# Altium PCB activity_tracker_panel.PcbDoc
Units mm, origin at the board's own origin, x right, y up, seen from the top; angles counter-clockwise.
Board outline 148.5 x 148.5 mm, 4 copper layers (Top Layer, MidLayer1, Mid-Layer 2, Bottom Layer), stack 0.79 mm thick; 11 components, 29 nets, 514 pads, 2 vias.
Unrouted connection lines stored in the file: 1.
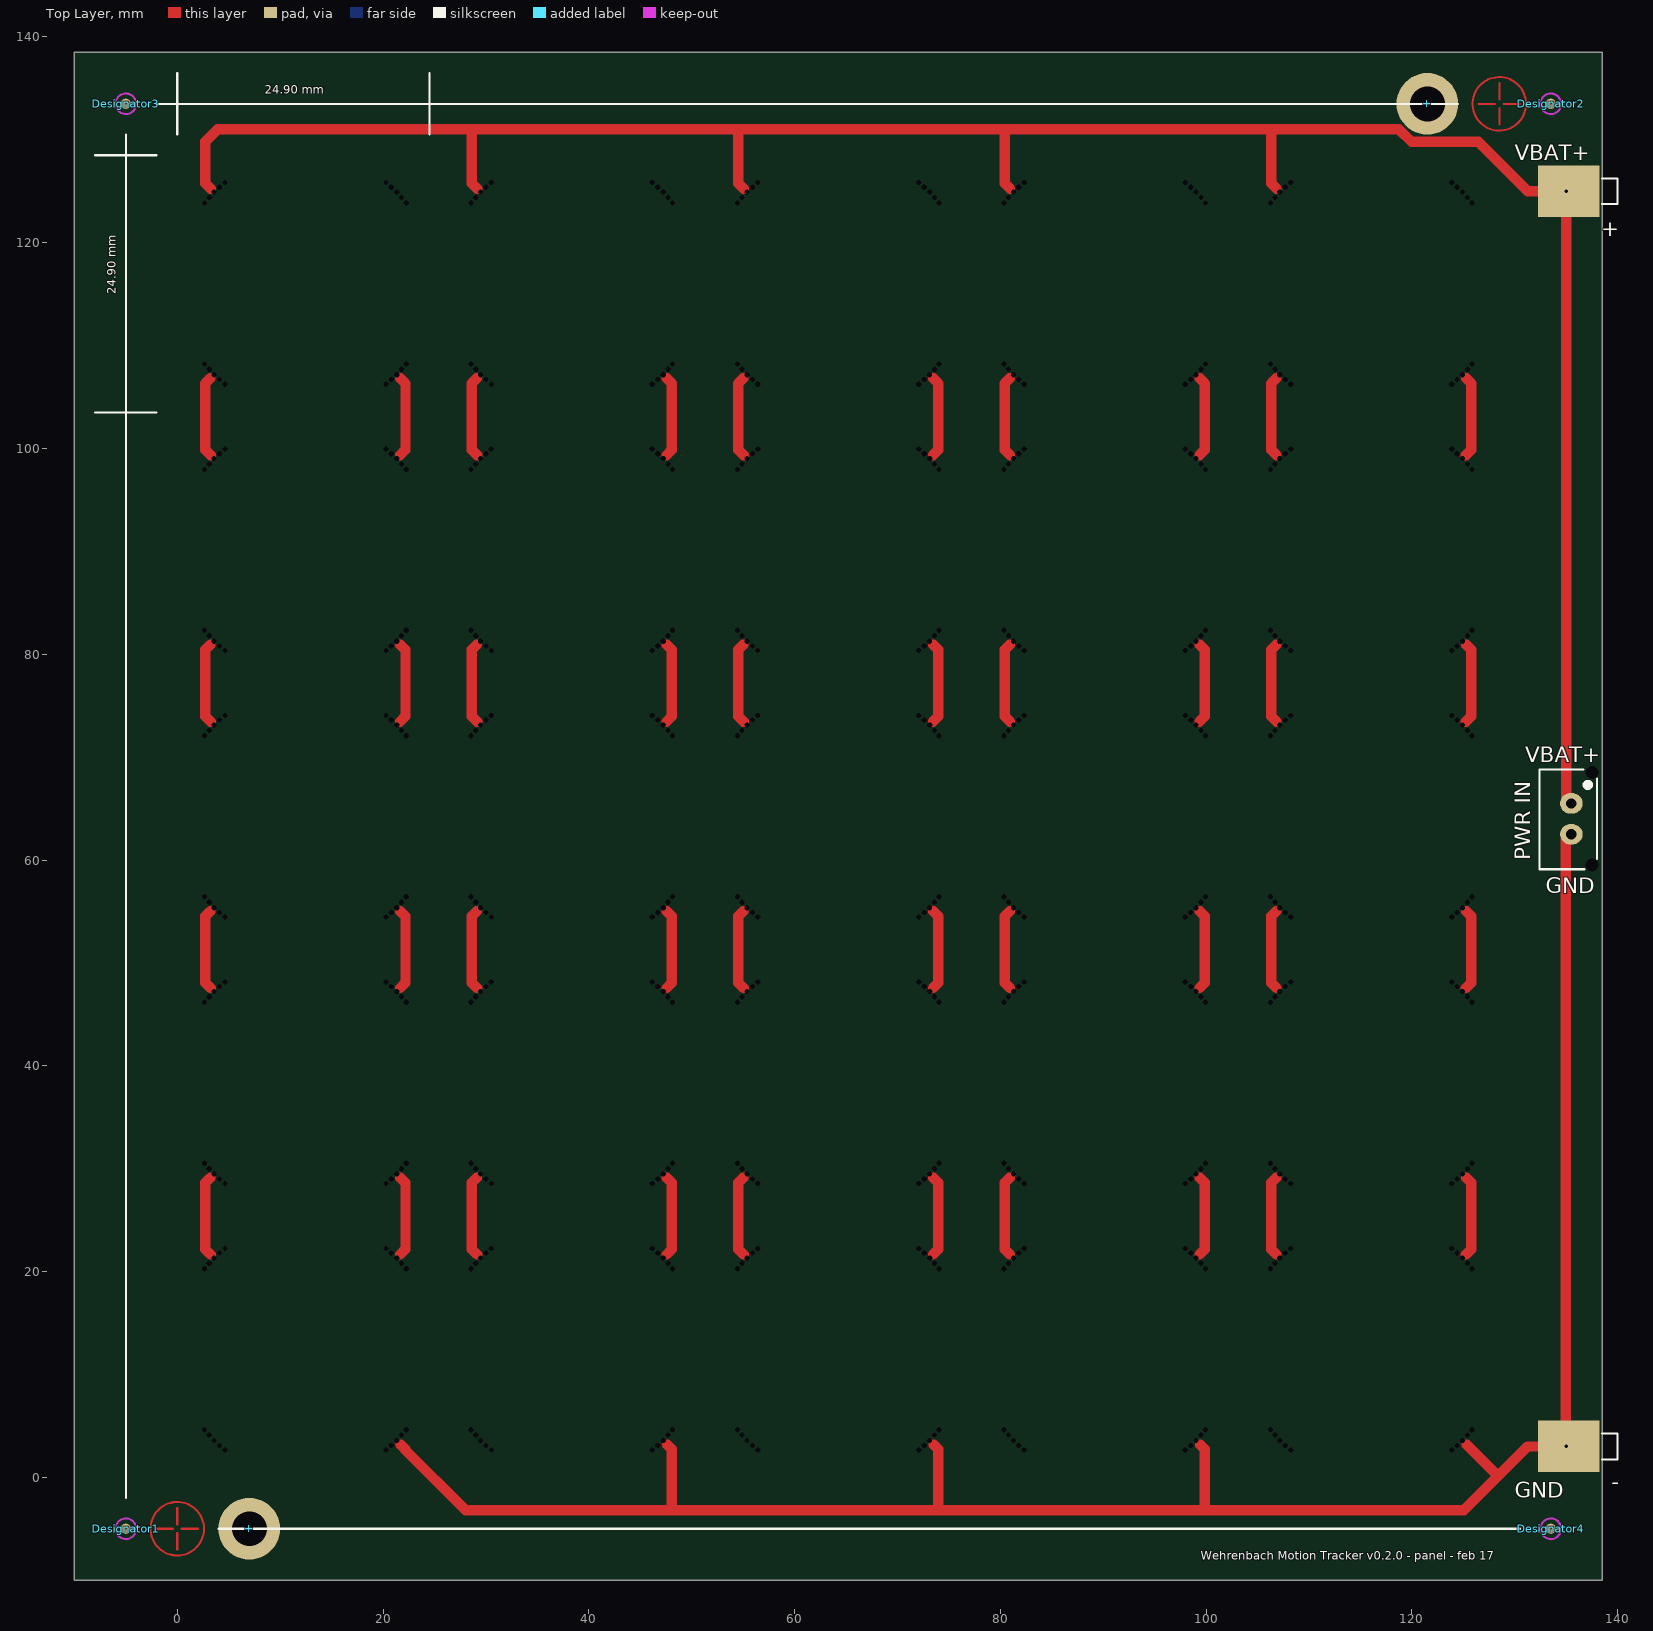
[diagram p0: Top Layer view]
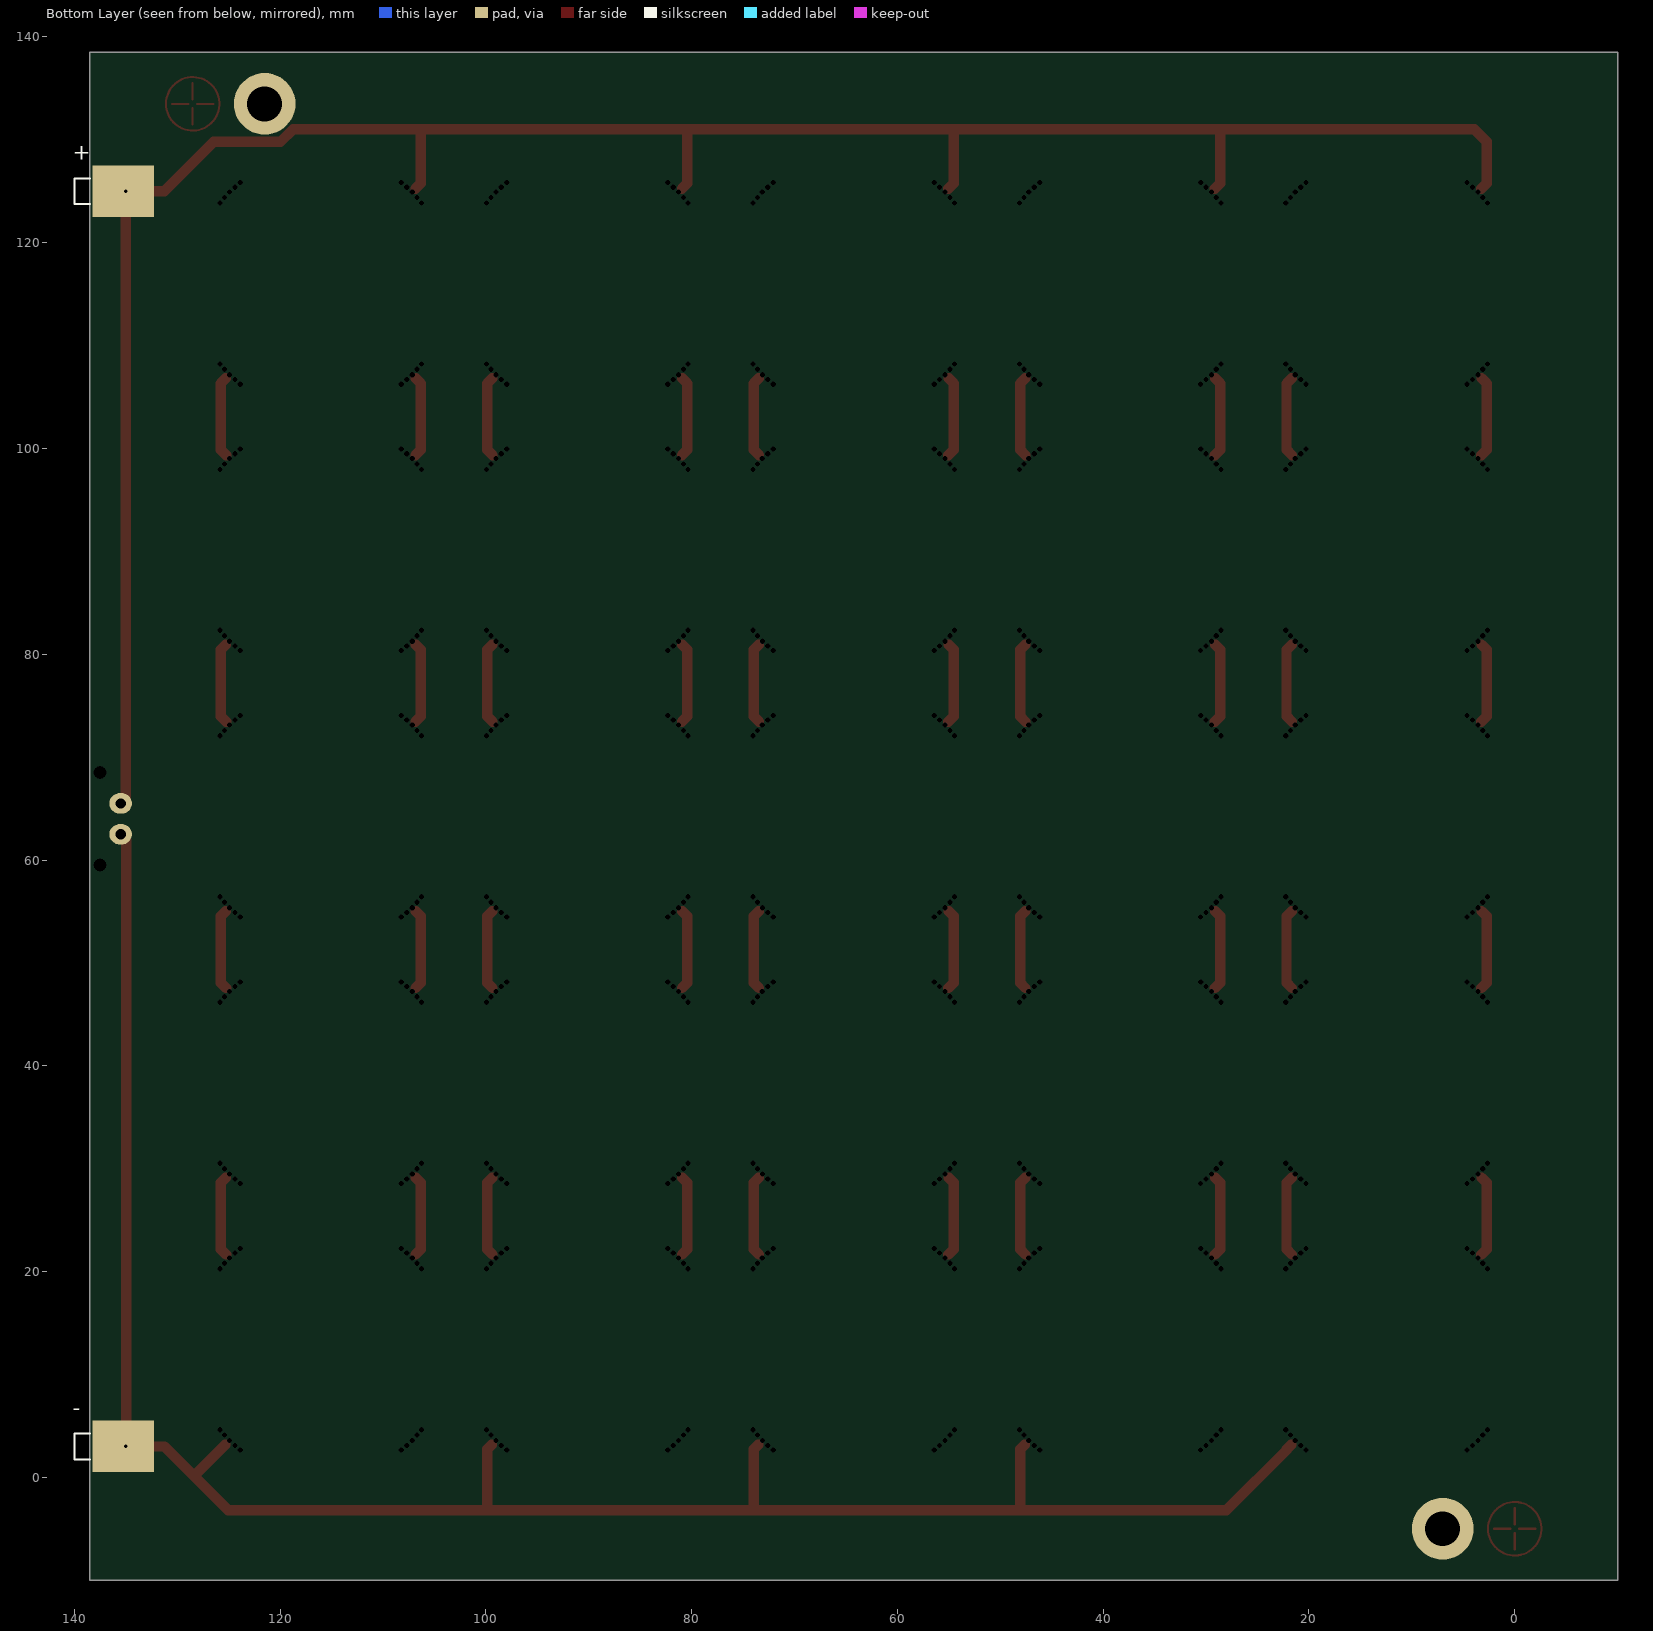
[diagram p1: Bottom Layer view, seen from below]

## Layer stack, top to bottom
Top Solder: solder mask 0.0102, Solder Resist, Dk 3.5
Top Layer: signal copper 0.0356
Dielectric1: prepreg 0.1, FR-4, Dk 4.8
MidLayer1: signal copper 0.0356
Dielectric2: prepreg 0.228, FR-4, Dk 4.8
Mid-Layer 2: signal copper 0.0356
Dielectric3: core 0.32, FR-4, Dk 4.8
Bottom Layer: signal copper 0.0356
Bottom Solder: solder mask 0.0102, Solder Resist, Dk 3.5

## Board outline
-9.999,-9.999 -9.999,138.501 138.501,138.501 138.501,-9.999 -9.999,-9.999

## Design rules (kind name [scope] priority, off if disabled: settings)
AcuteAngle [All] p1: minimum=4.00000000000000E+0001 checktracksonly=FALSE
Clearance ClearanceLogoStyle1 [All vs InComponentClass('logoStyle1')] p1: gap=0.3 ignorepadtopadclearanceinfootprint=FALSE except(0: Arc-Hole Track-Hole SMDPad-Hole THPad-Hole Via-Hole Fill-Hole Poly-Hole Region-Hole Text-Hole)
Clearance ClearanceKeepout [All vs IsKeepOut] p2: gap=0.001 ignorepadtopadclearanceinfootprint=FALSE except(0: Arc-Hole Track-Hole SMDPad-Hole THPad-Hole Via-Hole Fill-Hole Poly-Hole Region-Hole Text-Hole)
Clearance ClearanceThickWire [IsTrack And AsMM(Width) > 0.2] p3: gap=0.2 ignorepadtopadclearanceinfootprint=FALSE except(0: Arc-Hole Track-Hole SMDPad-Hole THPad-Hole Via-Hole Fill-Hole Poly-Hole Region-Hole Text-Hole)
Clearance ClearancePad [IsPad vs IsPad] p4: gap=0.15 ignorepadtopadclearanceinfootprint=FALSE except(0: Arc-Hole Track-Hole SMDPad-Hole THPad-Hole Via-Hole Fill-Hole Poly-Hole Region-Hole Text-Hole)
Clearance ClearancePolyPad [InPolygon vs IsPad] p5: gap=0.3 ignorepadtopadclearanceinfootprint=FALSE except(0: Arc-Hole Track-Hole SMDPad-Hole THPad-Hole Via-Hole Fill-Hole Poly-Hole Region-Hole Text-Hole)
Clearance ClearancePoly [InPolygon vs InPolygon] p6: gap=0.25 ignorepadtopadclearanceinfootprint=FALSE except(0: Arc-Hole Track-Hole SMDPad-Hole THPad-Hole Via-Hole Fill-Hole Poly-Hole Region-Hole Text-Hole)
Clearance [All] p7: gap=0.15 ignorepadtopadclearanceinfootprint=FALSE except(0: Arc-Hole Track-Hole SMDPad-Hole THPad-Hole Via-Hole Fill-Hole Poly-Hole Region-Hole Text-Hole)
ComponentClearance [All] p1: gap=0.1 collisioncheckmode=3 verticalgap=0.1 showdistances=TRUE
ComponentOrientations [All] p1: allowedrotations=32
Height [All] p1: minheight=0 maxheight=30 prefheight=1
HoleSize [All] p1: absolutevalues=TRUE maxlimit=15 minlimit=0.3 maxpercent=80.000 minpercent=20.000
HoleToHoleClearance [All] p1: gap=0.2 allowstackedmicrovias=TRUE
MinimumAnnularRing [All] p1: minimumring=0.15
MinimumSolderMaskSliver MinimumSolderMaskSliverLogo [All vs ( InComponentClass('ignoreSilkscreen') or InComponentClass('leitwertLogo'))] p1: minsoldermaskwidth=0
MinimumSolderMaskSliver [All] p2: minsoldermaskwidth=0.1
PasteMaskExpansion [All] p1: expansion=-0.075
PermittedLayers [All] p1: toplayerpermitted=TRUE bottomlayerpermitted=FALSE
PlaneClearance [All] p1: clearance=0.5
PlaneConnect [All] p1: planeconnectstyle=Relief reliefexpansion=0.5 reliefentries=4 reliefconductorwidth=0.25 reliefairgap=0.25
PolygonConnect PolygonConnectComponents [All vs InComponentClass('directConnect')] p1: connectstyle=Direct reliefconductorwidth=0.254 reliefentries=4 polygonreliefangle="90 Angle" airgapwidth=0.254
PolygonConnect PolygonConnectVia [IsVia] p2: connectstyle=Direct reliefconductorwidth=0.254 reliefentries=4 polygonreliefangle="90 Angle" airgapwidth=0.254
PolygonConnect PolygonConnectPoly [InPolygonClass('directConnect')] p3: connectstyle=Direct reliefconductorwidth=0.254 reliefentries=4 polygonreliefangle="90 Angle" airgapwidth=0.254
PolygonConnect [All] p4: connectstyle=Relief reliefconductorwidth=0.25 reliefentries=4 polygonreliefangle="90 Angle" airgapwidth=0.254
RoomDefinition Memory [InComponentClass('Memory')] p1: confinementstyle=ConfineIn formatcopy=TRUE lockcomponents=FALSE outline -6.574,-3.774 31.426,-3.774 31.426,29.426 -6.574,29.426
RoomDefinition activity_tracker [InComponentClass('activity_tracker')] p2: confinementstyle=ConfineIn formatcopy=TRUE lockcomponents=FALSE outline -23.574,-8.574 191.626,-8.574 191.626,28.426 -23.574,28.426
RoomDefinition Accelerometer [InComponentClass('Accelerometer')] p3: confinementstyle=ConfineIn formatcopy=TRUE lockcomponents=FALSE outline -8.374,-3.574 33.426,-3.574 33.426,29.426 -8.374,29.426
RoutingCorners [All] p1: cornerstyle=45-Degree minsetback=2.5 maxsetback=2.5
RoutingVias [All] p1: holewidth=0.3 width=0.6 viastyle="Through Hole" minholewidth=0.3 minwidth=0.5 maxholewidth=1.5 maxwidth=2
SilkToSilkClearance [All] p1: silktosilkclearance=0.1
SilkToSolderMaskClearance SilkscreenOverComponentPadsLogo [IsPad vs ( InComponentClass('ignoreSilkscreen') or InComponentClass('logoStyle1'))] p1: minsilkscreentomaskgap=0 clearancetoexposedcopper=TRUE
SilkToSolderMaskClearance SilkscreenOverComponentPads [IsPad vs not InComponentClass('ignoreSilkscreen')] p2: minsilkscreentomaskgap=0.001 clearancetoexposedcopper=TRUE
SolderMaskExpansion SolderMaskExpansionVia [IsVia] p1: expansion=-0.635
SolderMaskExpansion [All] p2: expansion=0.038
Width WidthLogoStyle1 [InComponentClass('logoStyle1')] p1: maxlimit=100 minlimit=0.15 preferedwidth=0.25 checkconnectedcopper=TRUE
Width [All] p2: maxlimit=10 minlimit=0.2 preferedwidth=0.2
19 further rules are at their usual default settings.

## Components (designator, comment, footprint, x,y, rotation, side; value= is the part's Value field where it differs from the comment)
+ "Comment" SOLDER_5x6 135.251,125.001 r180 bottom
+ "Comment" SOLDER_5x6 135.251,125.001 r180 top
+ "Comment" M3_PLATED_MEDIUM 7.001,-4.999 r270 top
+ "Comment" M3_PLATED_MEDIUM 121.501,133.501 r270 top
- "Comment" SOLDER_5x6 135.251,3.001 r180 top
- "Comment" SOLDER_5x6 135.251,3.001 r180 bottom
Designator1 "Comment" FEDUCIAL_1MM -4.999,-4.999 r0 top
Designator2 "Comment" FEDUCIAL_1MM 133.501,133.501 r180 top
Designator3 "Comment" FEDUCIAL_1MM -4.999,133.501 r0 top
Designator4 "Comment" FEDUCIAL_1MM 133.501,-4.999 r180 top
"PWR IN" "Comment" 0436500215 135.501,64.001 r270 top

## Footprints (in the part's own frame and the unit in brackets; to place one, negate y for a bottom-side part, rotate by r counter-clockwise, add the part's x,y. Pads: shape width x height; smd on the part's side, far side on the other; paste and mask are expansions set on the pad)
0436500215 [mm] "Molex MicroFit - CONN HEADER 2POS 3MM VERT TIN"
  oval 2x2.2 hole 1: 1(-1.5,0) 2(1.5,0)
  round 0 hole 1.27 unplated paste-1.27: H(-4.5,2) H(4.5,2)
  silkscreen extent -4.8,-3.1 4.9,2.5, body extent -4.83,-3.13 4.83,2.47, height 9.95
FEDUCIAL_1MM [mm] "Feducial 1mm diameter"
  round 1 smd paste-0.5 mask+0.5: F(0,0)
  Top Layer keep-out circle w0.2: c0,0 r1
M3_PLATED_MEDIUM [mm] "Plated M3 Hole Medium Size"
  round 6 hole 3.4 paste-3: H(0,0)
SOLDER_5x6 [mm] "5 x 6 mm solder pad"
  rect 6x5 smd paste-3: 1(0,0)
  silkscreen extent -4.75,-1.25 -3.25,1.25, body extent -5.18,-1.2 -2.79,1.2, height 2.73

## Free pads (board coordinates)
  round 0 hole 0.5: 0(2.647,20.273) 0(2.647,46.173) 0(2.647,72.073) 0(2.647,97.973) 0(2.647,123.873) 0(2.648,4.628) 0(2.648,30.528) 0(2.648,56.428) 0(2.648,82.328) 0(2.648,108.228) 0(3.106,20.803) 0(3.106,46.703) 0(3.106,72.603) 0(3.106,98.503) 0(3.106,124.403) 0(3.107,4.097) 0(3.107,29.997) 0(3.107,55.897) 0(3.107,81.797) 0(3.107,107.697) 0(3.566,21.333) 0(3.566,47.233) 0(3.566,73.133) 0(3.566,99.033) 0(3.566,124.933) 0(3.567,3.567) 0(3.567,29.467) 0(3.567,55.367) 0(3.567,81.267) 0(3.567,107.167) 0(4.096,21.793) 0(4.096,47.693) 0(4.096,73.593) 0(4.096,99.493) 0(4.096,125.393) 0(4.097,3.108) 0(4.097,29.008) 0(4.097,54.908) 0(4.097,80.808) 0(4.097,106.708) 0(4.627,22.252) 0(4.627,48.152) 0(4.627,74.052) 0(4.627,99.952) 0(4.627,125.852) 0(4.627,2.648) 0(4.627,28.548) 0(4.627,54.448) 0(4.627,80.348) 0(4.627,106.248) 0(20.273,2.648) 0(20.273,28.548) 0(20.273,54.448) 0(20.273,80.348) 0(20.273,106.248) 0(20.273,22.252) 0(20.273,48.152) 0(20.273,74.052) 0(20.273,99.952) 0(20.273,125.852) 0(20.803,3.108) 0(20.803,29.008) 0(20.803,54.908) 0(20.803,80.808) 0(20.803,106.708) 0(20.804,21.793) 0(20.804,47.693) 0(20.804,73.593) 0(20.804,99.493) 0(20.804,125.393) 0(21.333,3.567) 0(21.333,29.467) 0(21.333,55.367) 0(21.333,81.267) 0(21.333,107.167) 0(21.334,21.333) 0(21.334,47.233) 0(21.334,73.133) 0(21.334,99.033) 0(21.334,124.933) 0(21.793,4.097) 0(21.793,29.997) 0(21.793,55.897) 0(21.793,81.797) 0(21.793,107.697) 0(21.794,20.803) 0(21.794,46.703) 0(21.794,72.603) 0(21.794,98.503) 0(21.794,124.403) 0(22.252,4.628) 0(22.252,30.528) 0(22.252,56.428) 0(22.252,82.328) 0(22.252,108.228) 0(22.253,20.273) 0(22.253,46.173) 0(22.253,72.073) 0(22.253,97.973) 0(22.253,123.873) 0(28.547,20.273) 0(28.547,46.173) 0(28.547,72.073) 0(28.547,97.973) 0(28.547,123.873) 0(28.548,4.628) 0(28.548,30.528) 0(28.548,56.428) 0(28.548,82.328) 0(28.548,108.228) 0(29.006,20.803) 0(29.006,46.703) 0(29.006,72.603) 0(29.006,98.503) 0(29.006,124.403) 0(29.007,4.097) 0(29.007,29.997) 0(29.007,55.897) 0(29.007,81.797) 0(29.007,107.697) 0(29.466,21.333) 0(29.466,47.233) 0(29.466,73.133) 0(29.466,99.033) 0(29.466,124.933) 0(29.467,3.567) 0(29.467,29.467) 0(29.467,55.367) 0(29.467,81.267) 0(29.467,107.167) 0(29.996,21.793) 0(29.996,47.693) 0(29.996,73.593) 0(29.996,99.493) 0(29.996,125.393) 0(29.997,3.108) 0(29.997,29.008) 0(29.997,54.908) 0(29.997,80.808) 0(29.997,106.708) 0(30.527,22.252) 0(30.527,48.152) 0(30.527,74.052) 0(30.527,99.952) 0(30.527,125.852) 0(30.527,2.648) 0(30.527,28.548) 0(30.527,54.448) 0(30.527,80.348) 0(30.527,106.248) 0(46.173,2.648) 0(46.173,28.548) 0(46.173,54.448) 0(46.173,80.348) 0(46.173,106.248) 0(46.173,22.252) 0(46.173,48.152) 0(46.173,74.052) 0(46.173,99.952) 0(46.173,125.852) 0(46.703,3.108) 0(46.703,29.008) 0(46.703,54.908) 0(46.703,80.808) 0(46.703,106.708) 0(46.704,21.793) 0(46.704,47.693) 0(46.704,73.593) 0(46.704,99.493) 0(46.704,125.393) 0(47.233,3.567) 0(47.233,29.467) 0(47.233,55.367) 0(47.233,81.267) 0(47.233,107.167) 0(47.234,21.333) 0(47.234,47.233) 0(47.234,73.133) 0(47.234,99.033) 0(47.234,124.933) 0(47.693,4.097) 0(47.693,29.997) 0(47.693,55.897) 0(47.693,81.797) 0(47.693,107.697) 0(47.694,20.803) 0(47.694,46.703) 0(47.694,72.603) 0(47.694,98.503) 0(47.694,124.403) 0(48.152,4.628) 0(48.152,30.528) 0(48.152,56.428) 0(48.152,82.328) 0(48.152,108.228) 0(48.153,20.273) 0(48.153,46.173) 0(48.153,72.073) 0(48.153,97.973) 0(48.153,123.873) 0(54.447,20.273) 0(54.447,46.173) 0(54.447,72.073) 0(54.447,97.973) 0(54.447,123.873) 0(54.448,4.628) 0(54.448,30.528) 0(54.448,56.428) 0(54.448,82.328) 0(54.448,108.228) 0(54.906,20.803) 0(54.906,46.703) 0(54.906,72.603) 0(54.906,98.503) 0(54.906,124.403) 0(54.907,4.097) 0(54.907,29.997) 0(54.907,55.897) 0(54.907,81.797) 0(54.907,107.697) 0(55.366,21.333) 0(55.366,47.233) 0(55.366,73.133) 0(55.366,99.033) 0(55.366,124.933) 0(55.367,3.567) 0(55.367,29.467) 0(55.367,55.367) 0(55.367,81.267) 0(55.367,107.167) 0(55.896,21.793) 0(55.896,47.693) 0(55.896,73.593) 0(55.896,99.493) 0(55.896,125.393) 0(55.897,3.108) 0(55.897,29.008) 0(55.897,54.908) 0(55.897,80.808) 0(55.897,106.708) 0(56.427,22.252) 0(56.427,48.152) 0(56.427,74.052) 0(56.427,99.952) 0(56.427,125.852) 0(56.427,2.648) 0(56.427,28.548) 0(56.427,54.448) 0(56.427,80.348) 0(56.427,106.248) 0(72.073,2.648) 0(72.073,28.548) 0(72.073,54.448) 0(72.073,80.348) 0(72.073,106.248) 0(72.073,22.252) 0(72.073,48.152) 0(72.073,74.052) 0(72.073,99.952) 0(72.073,125.852) 0(72.603,3.108) 0(72.603,29.008) 0(72.603,54.908) 0(72.603,80.808) 0(72.603,106.708) 0(72.604,21.793) 0(72.604,47.693) 0(72.604,73.593) 0(72.604,99.493) 0(72.604,125.393) 0(73.133,3.567) 0(73.133,29.467) 0(73.133,55.367) 0(73.133,81.267) 0(73.133,107.167) 0(73.134,21.333) 0(73.134,47.233) 0(73.134,73.133) 0(73.134,99.033) 0(73.134,124.933) 0(73.593,4.097) 0(73.593,29.997) 0(73.593,55.897) 0(73.593,81.797) 0(73.593,107.697) 0(73.594,20.803) 0(73.594,46.703) 0(73.594,72.603) 0(73.594,98.503) 0(73.594,124.403) 0(74.052,4.628) 0(74.052,30.528) 0(74.052,56.428) 0(74.052,82.328) 0(74.052,108.228) 0(74.053,20.273) 0(74.053,46.173) 0(74.053,72.073) 0(74.053,97.973) 0(74.053,123.873) 0(80.347,20.273) 0(80.347,46.173) 0(80.347,72.073) 0(80.347,97.973) 0(80.347,123.873) 0(80.348,4.628) 0(80.348,30.528) 0(80.348,56.428) 0(80.348,82.328) 0(80.348,108.228) 0(80.806,20.803) 0(80.806,46.703) 0(80.806,72.603) 0(80.806,98.503) 0(80.806,124.403) 0(80.807,4.097) 0(80.807,29.997) 0(80.807,55.897) 0(80.807,81.797) 0(80.807,107.697) 0(81.266,21.333) 0(81.266,47.233) 0(81.266,73.133) 0(81.266,99.033) 0(81.266,124.933) 0(81.267,3.567) 0(81.267,29.467) 0(81.267,55.367) 0(81.267,81.267) 0(81.267,107.167) 0(81.796,21.793) 0(81.796,47.693) 0(81.796,73.593) 0(81.796,99.493) 0(81.796,125.393) 0(81.797,3.108) 0(81.797,29.008) 0(81.797,54.908) 0(81.797,80.808) 0(81.797,106.708) 0(82.327,22.252) 0(82.327,48.152) 0(82.327,74.052) 0(82.327,99.952) 0(82.327,125.852) 0(82.327,2.648) 0(82.327,28.548) 0(82.327,54.448) 0(82.327,80.348) 0(82.327,106.248) 0(97.973,2.648) 0(97.973,28.548) 0(97.973,54.448) 0(97.973,80.348) 0(97.973,106.248) 0(97.973,22.252) 0(97.973,48.152) 0(97.973,74.052) 0(97.973,99.952) 0(97.973,125.852) 0(98.503,3.108) 0(98.503,29.008) 0(98.503,54.908) 0(98.503,80.808) 0(98.503,106.708) 0(98.504,21.793) 0(98.504,47.693) 0(98.504,73.593) 0(98.504,99.493) 0(98.504,125.393) 0(99.033,3.567) 0(99.033,29.467) 0(99.033,55.367) 0(99.033,81.267) 0(99.033,107.167) 0(99.034,21.333) 0(99.034,47.233) 0(99.034,73.133) 0(99.034,99.033) 0(99.034,124.933) 0(99.493,4.097) 0(99.493,29.997) 0(99.493,55.897) 0(99.493,81.797) 0(99.493,107.697) 0(99.494,20.803) 0(99.494,46.703) 0(99.494,72.603) 0(99.494,98.503) 0(99.494,124.403) 0(99.952,4.628) 0(99.952,30.528) 0(99.952,56.428) 0(99.952,82.328) 0(99.952,108.228) 0(99.953,20.273) 0(99.953,46.173) 0(99.953,72.073) 0(99.953,97.973) 0(99.953,123.873) 0(106.247,20.273) 0(106.247,46.173) 0(106.247,72.073) 0(106.247,97.973) 0(106.247,123.873) 0(106.248,4.628) 0(106.248,30.528) 0(106.248,56.428) 0(106.248,82.328) 0(106.248,108.228) 0(106.706,20.803) 0(106.706,46.703) 0(106.706,72.603) 0(106.706,98.503) 0(106.706,124.403) 0(106.707,4.097) 0(106.707,29.997) 0(106.707,55.897) 0(106.707,81.797) 0(106.707,107.697) 0(107.166,21.333) 0(107.166,47.233) 0(107.166,73.133) 0(107.166,99.033) 0(107.166,124.933) 0(107.167,3.567) 0(107.167,29.467) 0(107.167,55.367) 0(107.167,81.267) 0(107.167,107.167) 0(107.696,21.793) 0(107.696,47.693) 0(107.696,73.593) 0(107.696,99.493) 0(107.696,125.393) 0(107.697,3.108) 0(107.697,29.008) 0(107.697,54.908) 0(107.697,80.808) 0(107.697,106.708) 0(108.227,22.252) 0(108.227,48.152) 0(108.227,74.052) 0(108.227,99.952) 0(108.227,125.852) 0(108.227,2.648) 0(108.227,28.548) 0(108.227,54.448) 0(108.227,80.348) 0(108.227,106.248) 0(123.873,2.648) 0(123.873,28.548) 0(123.873,54.448) 0(123.873,80.348) 0(123.873,106.248) 0(123.873,22.252) 0(123.873,48.152) 0(123.873,74.052) 0(123.873,99.952) 0(123.873,125.852) 0(124.403,3.108) 0(124.403,29.008) 0(124.403,54.908) 0(124.403,80.808) 0(124.403,106.708) 0(124.404,21.793) 0(124.404,47.693) 0(124.404,73.593) 0(124.404,99.493) 0(124.404,125.393) 0(124.933,3.567) 0(124.933,29.467) 0(124.933,55.367) 0(124.933,81.267) 0(124.933,107.167) 0(124.934,21.333) 0(124.934,47.233) 0(124.934,73.133) 0(124.934,99.033) 0(124.934,124.933) 0(125.393,4.097) 0(125.393,29.997) 0(125.393,55.897) 0(125.393,81.797) 0(125.393,107.697) 0(125.394,20.803) 0(125.394,46.703) 0(125.394,72.603) 0(125.394,98.503) 0(125.394,124.403) 0(125.852,4.628) 0(125.852,30.528) 0(125.852,56.428) 0(125.852,82.328) 0(125.852,108.228) 0(125.853,20.273) 0(125.853,46.173) 0(125.853,72.073) 0(125.853,97.973) 0(125.853,123.873)

## Via types
v1: diameter 0.75, hole 0.35, Top Layer to Bottom Layer, 2 vias

## Nets (pads, with @x,y where several pads share a name; then routed paths per layer and width w, separated by ;. In a path a pad name is that pad's centre, name@x,y a point inside that pad or via, vN(x,y) a via of type N, cw(c..) or ccw(c..) an arc to the next point about the centre after c; other vN are vias at no path point)
ACC_ADC: 
ACC_C\S\: 
ACC_INT1: 
ACC_INT2: 
ACC_MISO: 
ACC_MOSI: 
ACC_SCK: 
FL_C\S\: 
FL_E\N\: 
FL_F\S\H\D\N\: 
FL_MISO: 
FL_MOSI: 
FL_SCK: 
GND: "PWR IN.2" -.1@135.251,3.001 pad.0@21.333,3.567 pad.0@47.233,3.567 pad.0@73.133,3.567 pad.0@99.033,3.567 pad.0@124.933,3.567 | length 202.7
  Top Layer w1: 21.726,3.176 22.177,2.726 ; 22.139,2.688 28.026,-3.199 48.051,-3.199 ; 47.626,3.176 48.077,2.726 48.077,-3.173 48.051,-3.199 ; 73.526,3.176 73.977,2.726 73.977,-3.173 73.951,-3.199 ; 99.426,3.176 99.877,2.726 99.877,-3.125 99.951,-3.199 ; 125.326,3.176 125.777,2.726 128.301,0.202 128.301,0.051 ; -.1@134.951,2.626 -.1@134.951,3.001 ; v1(135.001,3.001) -.1@134.951,3.001 ; 135.501,62.501 134.951,61.951 -.1@134.951,3.001 ; 48.051,-3.199 73.951,-3.199 ; 73.951,-3.199 99.951,-3.199 ; 99.951,-3.199 125.051,-3.199 128.301,0.051 ; 128.301,0.051 131.251,3.001 -.1@134.951,3.001
INT_BUT: 
LED1: 
LED2: 
NetC2_2: 
NetC11_1: 
NetLED1_1: 
NetLED2_1: 
RESET: 
SWDCLK: 
SWDIO: 
SWO: 
V_FL+: 
VBAT+: "PWR IN.1" +.1@135.251,125.001 pad.0@29.466,124.933 pad.0@55.366,124.933 pad.0@81.266,124.933 pad.0@99.034,124.933 pad.0@107.166,124.933 | length 223.7
  Top Layer w1: 2.723,125.776 3.249,125.25 ; 2.726,125.777 2.726,129.826 3.926,131.026 28.626,131.026 ; 28.623,125.776 29.149,125.25 ; 28.626,125.777 28.626,131.026 ; 54.523,125.776 55.049,125.25 ; 54.526,125.777 54.526,131.026 ; 80.423,125.776 80.949,125.25 ; 80.426,125.777 80.426,131.026 ; 106.323,125.776 106.849,125.25 ; 106.326,125.777 106.326,131.026 ; 135.501,65.501 135.001,66.001 v1(135.001,125.001) 131.251,125.001 126.451,129.801 119.968,129.801 118.743,131.026 106.326,131.026 ; 28.626,131.026 54.526,131.026 ; 54.526,131.026 80.426,131.026 ; 80.426,131.026 106.326,131.026
XL1: 
XL2: 
pads on no net: "PWR IN.H" +.1@135.251,125.001 +.H -.1@135.251,3.001 Designator1.F Designator2.F Designator3.F Designator4.F
copper on no net: | length 361.5
  Top Layer w0.2: -1.999,-4.999 -0.399,-4.999 ; 0.001,-6.999 0.001,-5.399 ; 0.001,-4.599 0.001,-2.999 ; 0.401,-4.999 2.001,-4.999 ; 126.501,133.501 128.101,133.501 ; 128.501,131.501 128.501,133.101 ; 128.501,133.901 128.501,135.501 ; 128.901,133.501 130.501,133.501 ; 2.601,-4.999 ccw(c0.001,-4.999) 2.601,-4.999 ; 131.101,133.501 ccw(c128.501,133.501) 131.101,133.501
  Top Layer w1: 3.224,29.126 2.723,28.626 2.723,22.176 3.249,21.65 ; 3.224,55.026 2.723,54.526 2.723,48.076 3.249,47.55 ; 3.224,80.926 2.723,80.426 2.723,73.976 3.249,73.45 ; 3.224,106.826 2.723,106.326 2.723,99.876 3.249,99.35 ; 21.651,21.65 22.177,22.176 22.177,28.626 21.676,29.126 ; 21.651,47.55 22.177,48.076 22.177,54.526 21.676,55.026 ; 21.651,73.45 22.177,73.976 22.177,80.426 21.676,80.926 ; 21.651,99.35 22.177,99.876 22.177,106.326 21.676,106.826 ; 29.124,29.126 28.623,28.626 28.623,22.176 29.149,21.65 ; 29.124,55.026 28.623,54.526 28.623,48.076 29.149,47.55 ; 29.124,80.926 28.623,80.426 28.623,73.976 29.149,73.45 ; 29.124,106.826 28.623,106.326 28.623,99.876 29.149,99.35 ; 47.551,21.65 48.077,22.176 48.077,28.626 47.576,29.126 ; 47.551,47.55 48.077,48.076 48.077,54.526 47.576,55.026 ; 47.551,73.45 48.077,73.976 48.077,80.426 47.576,80.926 ; 47.551,99.35 48.077,99.876 48.077,106.326 47.576,106.826 ; 55.024,29.126 54.523,28.626 54.523,22.176 55.049,21.65 ; 55.024,55.026 54.523,54.526 54.523,48.076 55.049,47.55 ; 55.024,80.926 54.523,80.426 54.523,73.976 55.049,73.45 ; 55.024,106.826 54.523,106.326 54.523,99.876 55.049,99.35 ; 73.451,21.65 73.977,22.176 73.977,28.626 73.476,29.126 ; 73.451,47.55 73.977,48.076 73.977,54.526 73.476,55.026 ; 73.451,73.45 73.977,73.976 73.977,80.426 73.476,80.926 ; 73.451,99.35 73.977,99.876 73.977,106.326 73.476,106.826 ; 80.924,29.126 80.423,28.626 80.423,22.176 80.949,21.65 ; 80.924,55.026 80.423,54.526 80.423,48.076 80.949,47.55 ; 80.924,80.926 80.423,80.426 80.423,73.976 80.949,73.45 ; 80.924,106.826 80.423,106.326 80.423,99.876 80.949,99.35 ; 99.351,21.65 99.877,22.176 99.877,28.626 99.376,29.126 ; 99.351,47.55 99.877,48.076 99.877,54.526 99.376,55.026 ; 99.351,73.45 99.877,73.976 99.877,80.426 99.376,80.926 ; 99.351,99.35 99.877,99.876 99.877,106.326 99.376,106.826 ; 106.824,29.126 106.323,28.626 106.323,22.176 106.849,21.65 ; 106.824,55.026 106.323,54.526 106.323,48.076 106.849,47.55 ; 106.824,80.926 106.323,80.426 106.323,73.976 106.849,73.45 ; 106.824,106.826 106.323,106.326 106.323,99.876 106.849,99.35 ; 125.251,21.65 125.777,22.176 125.777,28.626 125.276,29.126 ; 125.251,47.55 125.777,48.076 125.777,54.526 125.276,55.026 ; 125.251,73.45 125.777,73.976 125.777,80.426 125.276,80.926 ; 125.251,99.35 125.777,99.876 125.777,106.326 125.276,106.826

## Silkscreen, mask and mechanical layers (free items; w line width, h text height)
Top Overlay:
  lines w0.2: -7.999,103.501 -1.999,103.501 ; -7.999,128.501 -1.999,128.501 ; -4.999,-1.999 -4.999,130.501 ; -1.999,133.501 124.501,133.501 ; 0.001,130.501 0.001,136.501 ; 4.001,-4.999 130.501,-4.999 ; 24.501,130.501 24.501,136.501
  text "24.90 mm" at 8.501,134.501 h0.8
  text "VBAT+" at 130.001,128.001 h1.52
  text "24.90 mm" at -5.999,115.001 h0.8 r90
  text "VBAT+" at 131.001,69.501 h1.52
  text "GND" at 133.001,56.751 h1.52
  text "GND" at 130.001,-1.999 h1.52
  text "Wehrenbach Motion Tracker v0.2.0 - panel - feb 17" at 99.501,-7.999 h0.8
Top Paste:
  circle w0.2: c0.001,-4.999 r2.6
  circle w0.2: c128.501,133.501 r2.6
  lines w0.2: -1.999,-4.999 -0.399,-4.999 ; 0.001,-6.999 0.001,-5.399 ; 0.001,-4.599 0.001,-2.999 ; 0.401,-4.999 2.001,-4.999 ; 126.501,133.501 128.101,133.501 ; 128.501,131.501 128.501,133.101 ; 128.501,133.901 128.501,135.501 ; 128.901,133.501 130.501,133.501
Top Solder:
  circle w0.2: c0.001,-4.999 r2.6
  circle w0.2: c128.501,133.501 r2.6
  lines w0.2: -1.999,-4.999 -0.399,-4.999 ; 0.001,-6.999 0.001,-5.399 ; 0.001,-4.599 0.001,-2.999 ; 0.401,-4.999 2.001,-4.999 ; 126.501,133.501 128.101,133.501 ; 128.501,131.501 128.501,133.101 ; 128.501,133.901 128.501,135.501 ; 128.901,133.501 130.501,133.501
Route Cutter Tool:
  lines w0.2: 12.451,25.451 12.526,25.351 ; 12.451,51.351 12.526,51.251 ; 12.451,77.251 12.526,77.151 ; 12.451,103.151 12.526,103.051 ; 12.451,129.051 12.526,128.951
  lines w1: 2.108,4.657 cw(c12.451,12.451) 2.108,20.244 ; 2.108,30.557 cw(c12.451,38.351) 2.108,46.144 ; 2.108,56.457 cw(c12.451,64.251) 2.108,72.044 ; 2.108,82.357 cw(c12.451,90.151) 2.108,97.944 ; 2.108,108.257 cw(c12.451,116.051) 2.108,123.844 ; 4.657,2.108 ccw(c12.451,12.451) 20.244,2.108 ; 4.657,22.793 cw(c12.451,12.451) 20.244,22.793 ; 4.657,28.008 ccw(c12.451,38.351) 20.244,28.008 ; 4.657,48.693 cw(c12.451,38.351) 20.244,48.693 ; 4.657,53.908 ccw(c12.451,64.251) 20.244,53.908 ; 4.657,74.593 cw(c12.451,64.251) 20.244,74.593 ; 4.657,79.808 ccw(c12.451,90.151) 20.244,79.808 ; 4.657,100.493 cw(c12.451,90.151) 20.244,100.493 ; 4.657,105.708 ccw(c12.451,116.051) 20.244,105.708 ; 4.657,126.393 cw(c12.451,116.051) 20.244,126.393 ; 22.793,4.657 ccw(c12.451,12.451) 22.793,20.244 ; 22.793,30.557 ccw(c12.451,38.351) 22.793,46.144 ; 22.793,56.457 ccw(c12.451,64.251) 22.793,72.044 ; 22.793,82.357 ccw(c12.451,90.151) 22.793,97.944 ; 22.793,108.257 ccw(c12.451,116.051) 22.793,123.844 ; 28.008,4.657 cw(c38.351,12.451) 28.008,20.244 ; 28.008,30.557 cw(c38.351,38.351) 28.008,46.144 ; 28.008,56.457 cw(c38.351,64.251) 28.008,72.044 ; 28.008,82.357 cw(c38.351,90.151) 28.008,97.944 ; 28.008,108.257 cw(c38.351,116.051) 28.008,123.844 ; 30.557,2.108 ccw(c38.351,12.451) 46.144,2.108 ; 30.557,22.793 cw(c38.351,12.451) 46.144,22.793 ; 30.557,28.008 ccw(c38.351,38.351) 46.144,28.008 ; 30.557,48.693 cw(c38.351,38.351) 46.144,48.693 ; 30.557,53.908 ccw(c38.351,64.251) 46.144,53.908 ; 30.557,74.593 cw(c38.351,64.251) 46.144,74.593 ; 30.557,79.808 ccw(c38.351,90.151) 46.144,79.808 ; 30.557,100.493 cw(c38.351,90.151) 46.144,100.493 ; 30.557,105.708 ccw(c38.351,116.051) 46.144,105.708 ; 30.557,126.393 cw(c38.351,116.051) 46.144,126.393 ; 48.693,4.657 ccw(c38.351,12.451) 48.693,20.244 ; 48.693,30.557 ccw(c38.351,38.351) 48.693,46.144 ; 48.693,56.457 ccw(c38.351,64.251) 48.693,72.044 ; 48.693,82.357 ccw(c38.351,90.151) 48.693,97.944 ; 48.693,108.257 ccw(c38.351,116.051) 48.693,123.844 ; 53.908,4.657 cw(c64.251,12.451) 53.908,20.244 ; 53.908,30.557 cw(c64.251,38.351) 53.908,46.144 ; 53.908,56.457 cw(c64.251,64.251) 53.908,72.044 ; 53.908,82.357 cw(c64.251,90.151) 53.908,97.944 ; 53.908,108.257 cw(c64.251,116.051) 53.908,123.844 ; 56.457,2.108 ccw(c64.251,12.451) 72.044,2.108 ; 56.457,22.793 cw(c64.251,12.451) 72.044,22.793 ; 56.457,28.008 ccw(c64.251,38.351) 72.044,28.008 ; 56.457,48.693 cw(c64.251,38.351) 72.044,48.693 ; 56.457,53.908 ccw(c64.251,64.251) 72.044,53.908 ; 56.457,74.593 cw(c64.251,64.251) 72.044,74.593 ; 56.457,79.808 ccw(c64.251,90.151) 72.044,79.808 ; 56.457,100.493 cw(c64.251,90.151) 72.044,100.493 ; 56.457,105.708 ccw(c64.251,116.051) 72.044,105.708 ; 56.457,126.393 cw(c64.251,116.051) 72.044,126.393 ; 74.593,4.657 ccw(c64.251,12.451) 74.593,20.244 ; 74.593,30.557 ccw(c64.251,38.351) 74.593,46.144 ; 74.593,56.457 ccw(c64.251,64.251) 74.593,72.044 ; 74.593,82.357 ccw(c64.251,90.151) 74.593,97.944 ; 74.593,108.257 ccw(c64.251,116.051) 74.593,123.844 ; 79.808,4.657 cw(c90.151,12.451) 79.808,20.244 ; 79.808,30.557 cw(c90.151,38.351) 79.808,46.144 ; 79.808,56.457 cw(c90.151,64.251) 79.808,72.044 ; 79.808,82.357 cw(c90.151,90.151) 79.808,97.944 ; 79.808,108.257 cw(c90.151,116.051) 79.808,123.844 ; 82.357,2.108 ccw(c90.151,12.451) 97.944,2.108 ; 82.357,22.793 cw(c90.151,12.451) 97.944,22.793 ; 82.357,28.008 ccw(c90.151,38.351) 97.944,28.008 ; 82.357,48.693 cw(c90.151,38.351) 97.944,48.693 ; 82.357,53.908 ccw(c90.151,64.251) 97.944,53.908 ; 82.357,74.593 cw(c90.151,64.251) 97.944,74.593 ; 82.357,79.808 ccw(c90.151,90.151) 97.944,79.808 ; 82.357,100.493 cw(c90.151,90.151) 97.944,100.493 ; 82.357,105.708 ccw(c90.151,116.051) 97.944,105.708 ; 82.357,126.393 cw(c90.151,116.051) 97.944,126.393 ; 100.493,4.657 ccw(c90.151,12.451) 100.493,20.244 ; 100.493,30.557 ccw(c90.151,38.351) 100.493,46.144 ; 100.493,56.457 ccw(c90.151,64.251) 100.493,72.044 ; 100.493,82.357 ccw(c90.151,90.151) 100.493,97.944 ; 100.493,108.257 ccw(c90.151,116.051) 100.493,123.844 ; 105.708,4.657 cw(c116.051,12.451) 105.708,20.244 ; 105.708,30.557 cw(c116.051,38.351) 105.708,46.144 ; 105.708,56.457 cw(c116.051,64.251) 105.708,72.044 ; 105.708,82.357 cw(c116.051,90.151) 105.708,97.944 ; 105.708,108.257 cw(c116.051,116.051) 105.708,123.844 ; 108.257,2.108 ccw(c116.051,12.451) 123.844,2.108 ; 108.257,22.793 cw(c116.051,12.451) 123.844,22.793 ; 108.257,28.008 ccw(c116.051,38.351) 123.844,28.008 ; 108.257,48.693 cw(c116.051,38.351) 123.844,48.693 ; 108.257,53.908 ccw(c116.051,64.251) 123.844,53.908 ; 108.257,74.593 cw(c116.051,64.251) 123.844,74.593 ; 108.257,79.808 ccw(c116.051,90.151) 123.844,79.808 ; 108.257,100.493 cw(c116.051,90.151) 123.844,100.493 ; 108.257,105.708 ccw(c116.051,116.051) 123.844,105.708 ; 108.257,126.393 cw(c116.051,116.051) 123.844,126.393 ; 126.393,4.657 ccw(c116.051,12.451) 126.393,20.244 ; 126.393,30.557 ccw(c116.051,38.351) 126.393,46.144 ; 126.393,56.457 ccw(c116.051,64.251) 126.393,72.044 ; 126.393,82.357 ccw(c116.051,90.151) 126.393,97.944 ; 126.393,108.257 ccw(c116.051,116.051) 126.393,123.844
  lines w1.3: 12.451,23.901 12.451,24.901 ; 12.451,49.801 12.451,50.801 ; 12.451,75.701 12.451,76.701 ; 12.451,101.601 12.451,102.601 ; 12.451,127.501 12.451,128.501 ; 38.351,23.901 38.351,24.901 ; 38.351,49.801 38.351,50.801 ; 38.351,75.701 38.351,76.701 ; 38.351,101.601 38.351,102.601 ; 38.351,127.501 38.351,128.501 ; 64.251,23.901 64.251,24.901 ; 64.251,49.801 64.251,50.801 ; 64.251,75.701 64.251,76.701 ; 64.251,101.601 64.251,102.601 ; 64.251,127.501 64.251,128.501 ; 90.151,23.901 90.151,24.901 ; 90.151,49.801 90.151,50.801 ; 90.151,75.701 90.151,76.701 ; 90.151,101.601 90.151,102.601 ; 90.151,127.501 90.151,128.501 ; 116.051,23.901 116.051,24.901 ; 116.051,49.801 116.051,50.801 ; 116.051,75.701 116.051,76.701 ; 116.051,101.601 116.051,102.601 ; 116.051,127.501 116.051,128.501
Outline:
  the board outline again, w0.2

## Panel: embedded boards
"activity_tracker.PcbDoc" at 0,0, 5 rows x 5 columns, spacing 25.9 x 25.9, rotation 0